# Altium PCB Dynamics Module v2.0.0.PcbDoc
Units mm, origin at the board's own origin, x right, y up, seen from the top; angles counter-clockwise.
Board outline 45.85 x 70 mm, 2 copper layers (Top Layer, Bottom Layer); 62 components, 40 nets, 242 pads, 118 vias.
Unrouted connection lines stored in the file: 57.
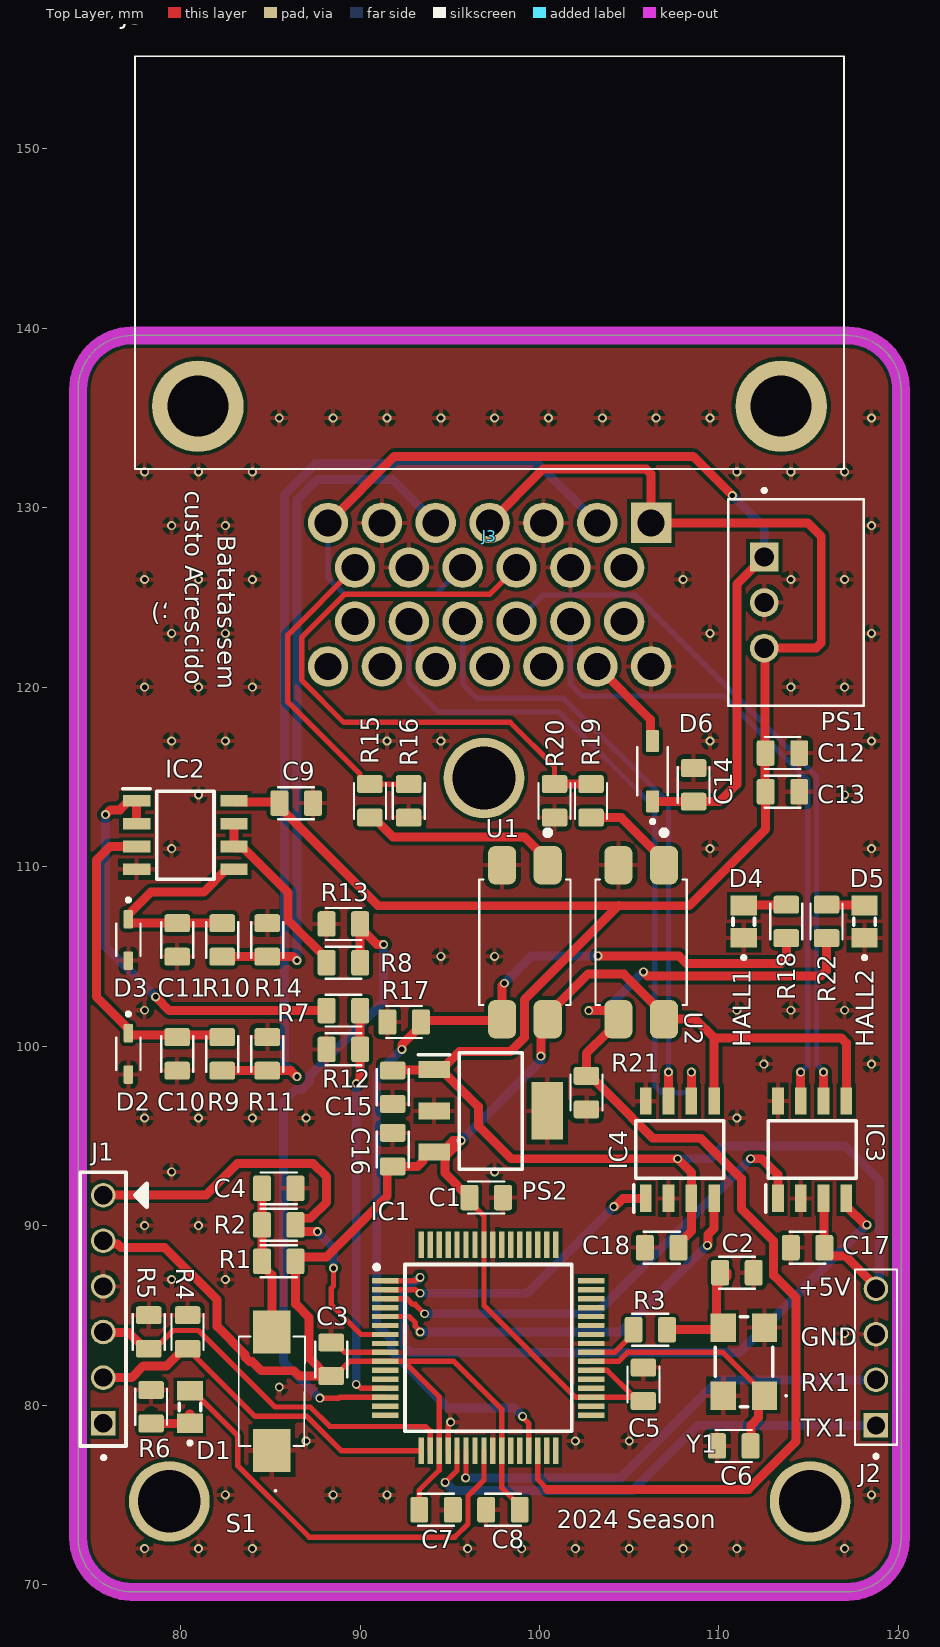
[diagram p0: Top Layer view]
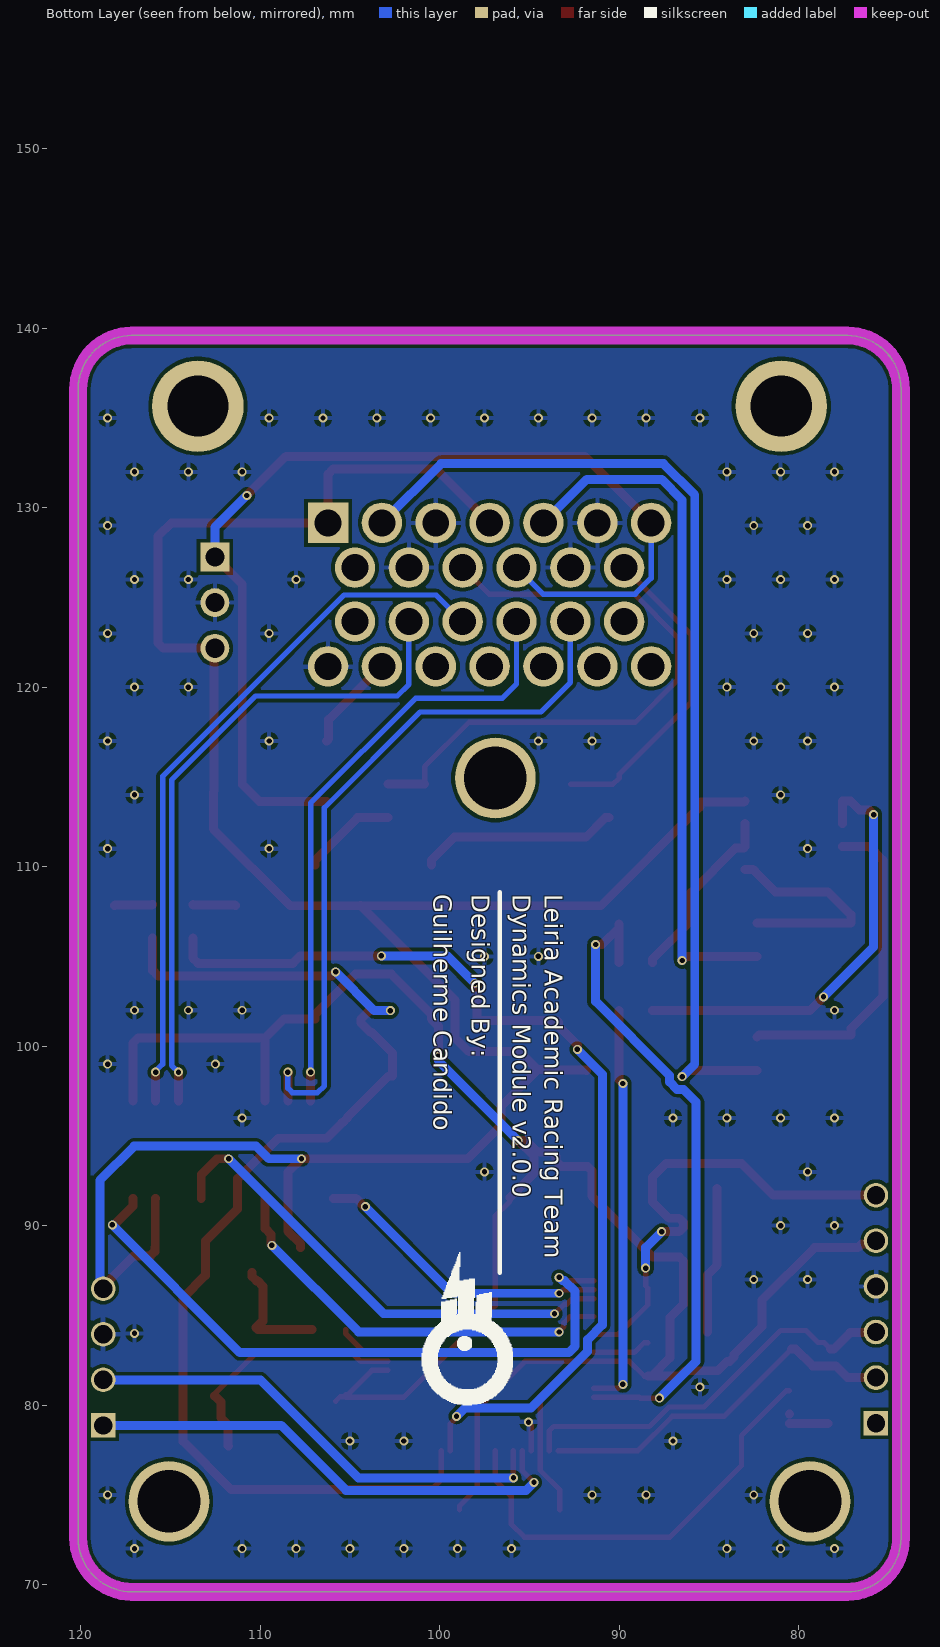
[diagram p1: Bottom Layer view, seen from below]
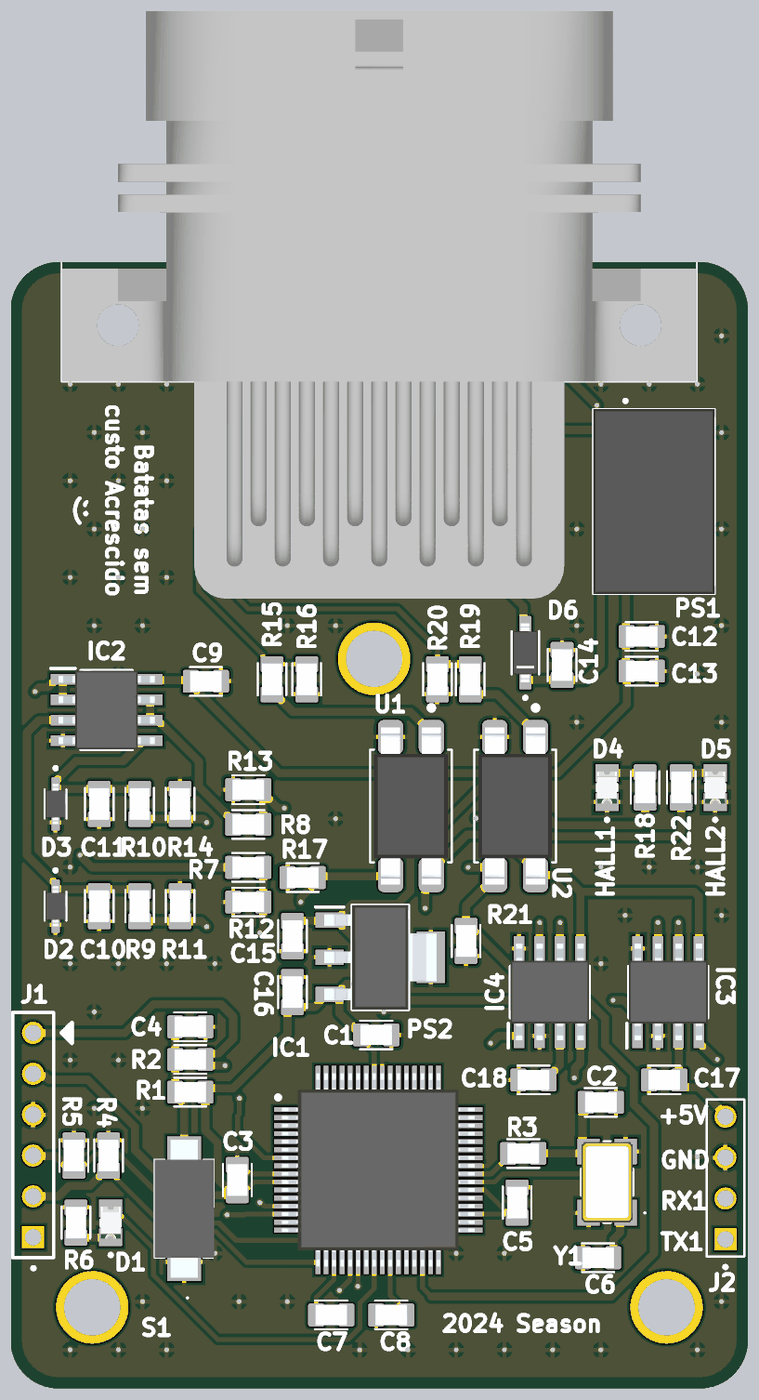
[diagram p2: 3D render of the assembled board from above, using the file's embedded part models]

## Layer stack, top to bottom
Top Solder: solder mask 0.0102, Solder Resist, Dk 3.5
Top Layer: signal copper 0.0356
Dielectric 1: dielectric 0.32, FR-4, Dk 4.8
Bottom Layer: signal copper 0.0356
Bottom Solder: solder mask 0.0102, Solder Resist, Dk 3.5

## Board outline
74.295,72.596 74.295,136.596 cw(c77.295,136.596) 77.295,139.596 117.142,139.596 cw(c117.142,136.596) 120.142,136.596 120.142,72.596 cw(c117.142,72.596) 117.142,69.596 77.295,69.596 cw(c77.295,72.596)

## Design rules (kind name [scope] priority, off if disabled: settings)
Clearance [All] p1: gap=0.2 ignorepadtopadclearanceinfootprint=TRUE
HoleSize [All] p1: absolutevalues=TRUE maxlimit=6.3 minlimit=0.3 maxpercent=80.000 minpercent=20.000
HoleToHoleClearance [All] p1: gap=0.5 allowstackedmicrovias=TRUE
PolygonConnect [All] p1: connectstyle=Relief reliefconductorwidth=0.254 reliefentries=4 polygonreliefangle="90 Angle" airgapwidth=0.254
RoutingVias [All] p1: holewidth=0.711 width=1.27 viastyle="Through Hole" minholewidth=0.3 minwidth=0.5 maxholewidth=6.3 maxwidth=10
SilkToSilkClearance [All] p1: silktosilkclearance=0
SolderMaskExpansion [All] p1: expansion=0.102 istentingtop=FALSE
UnRoutedNet [All] p1: checkbadconnections=TRUE
Width [All] p1: maxlimit=5 minlimit=0.127 preferedwidth=0.5 minimp=50.000000 maximp=50.000000 favimp=50.000000
26 further rules are at their usual default settings.

## Classes and differential pairs
component class "Power Circuitry": C12 C13 C14 C15 C16 D6 PS1 PS2
component class PIC32MK1024MCM064: C1 C2 C3 C4 C5 C6 C7 C8 D1 IC1 J1 R1 R2 R3 R4 R5 R6 S1 Y1
component class "Digital Circuitry": D4 D5 R15 R16 R17 R18 R19 R20 R21 R22 U1 U2
component class Connector: J3
component class "COMM Circuitry": C17 C18 IC3 IC4 J2
component class "Analog Circuitry": C9 C10 C11 D2 D3 IC2 R7 R8 R9 R10 R11 R12 R13 R14

## Components (designator, comment, footprint, x,y, rotation, side; value= is the part's Value field where it differs from the comment)
C1 "0.1uF" 0805 97.028,91.567 r180 top
C2 "22pF" 0805 110.998,87.376 r0 top
C3 "0.1uF" 0805 88.392,82.55 r90 top
C4 "0.1uF" 0805 85.471,92.075 r180 top
C5 "0.1uF" 0805 105.791,81.153 r270 top
C6 "22pF" 0805 110.825,77.724 r0 top
C7 "0.1uF" 0805 94.234,74.168 r180 top
C8 "0.1uF" 0805 97.963,74.168 r0 top
C9 "0.1uF" 0805 86.441,113.538 r180 top
C10 "10nF" 0805 79.812,99.568 r90 top
C11 "10nF" 0805 79.812,105.918 r90 top
C12 "10uF" 0805 113.538,116.332 r180 top
C13 "1uF" 0805 113.538,114.173 r180 top
C14 "10uF" 0805 108.585,114.554 r270 top
C15 "0.1uF" 0805 91.821,97.709 r90 top
C16 "0.1uF" 0805 91.821,94.234 r270 top
C17 "0.1uF" 0805 114.935,88.773 r0 top
C18 "0.1uF" 0805 106.807,88.773 r0 top
D1 "GREEN" "LED 0805" 80.518,79.894 r90 top
D2 "5.1V" SOD323 77.091,99.568 r270 top
D3 "5.1V" SOD323 77.091,105.918 r270 top
D4 "BLUE" "LED 0805" 111.379,106.934 r90 top
D5 "BLUE" "LED 0805" 118.11,106.934 r90 top
D6 "1N4007" SOD123 106.299,115.316 r90 top
IC1 "PIC32MK1024MCM064-I_PT" PIC32MK1024MCM064-I_PT 97.155,83.185 r0 top
IC2 "MCP6052-E_SN" MCP6052-E_SN 80.264,111.76 r0 top
IC3 "MCP2542FDT-E_SN" MCP2542FDT-E_SN 115.189,94.234 r90 top
IC4 "MCP2542FDT-E_SN" MCP2542FDT-E_SN 107.823,94.234 r90 top
J1 "6-POS 2.54mm Straight Header" "6-POS 2.54mm Header" 75.692,85.344 r270 top
J2 "4-POS 2.54mm Header" "4-POS 2.54mm Header" 118.745,78.867 r90 top
J3 "6473423-1" 64734231 106.218,129.159 r180 top locked
PS1 "R-78K5.0-0.5" CONV_R-78K5.0-0.5 114.297,124.714 r270 top
PS2 "MCP1755S-3302E_DB" MCP1755S-3302E_DB 97.282,96.393 r0 top
R1 "10k" 0805 85.471,88.011 r0 top
R2 "1k" 0805 85.471,90.043 r180 top
R3 "0805_Resistor" 0805 106.172,84.201 r0 top
R4 "10k" 0805 80.391,84.074 r270 top
R5 "10k" 0805 78.232,84.074 r270 top
R6 "10k" 0805 78.359,79.909 r270 top
R7 "10k" 0805 89.073,101.981 r180 top
R8 "10k" 0805 89.073,104.648 r180 top
R9 "1k" 0805 82.324,99.568 r90 top
R10 "1k" 0805 82.324,105.918 r90 top
R11 "1M" 0805 84.835,99.568 r270 top
R12 "20k" 0805 89.073,99.822 r0 top
R13 "20k" 0805 89.073,106.807 r0 top
R14 "1M" 0805 84.835,105.918 r270 top
R15 "1.3k" 0805 90.551,113.665 r270 top
R16 "10k" 0805 92.71,113.665 r90 top
R17 "10k" 0805 92.456,101.346 r0 top
R18 "1.2k" 0805 113.75,106.949 r270 top
R19 "1.3k" 0805 102.87,113.665 r270 top
R20 "10k" 0805 100.838,113.665 r90 top
R21 "10k" 0805 102.616,97.409 r90 top
R22 "1.2k" 0805 115.993,106.949 r270 top
S1 "SPST Button" "SPST Button" 85.09,80.77 r90 top
U1 "PC817" PC817 99.187,105.791 r270 top
U2 "PC817" PC817 105.664,105.791 r270 top
Y1 "8MHz" "Crystal 5x3.2 - 4Pads" 111.386,82.418 r90 top
? "M3 Mounting Hole" "M3 - Mounting Hole"#1 80.772,74.295 r0 top
? "M3 Mounting Hole" "M3 - Mounting Hole"#2 114.681,74.041 r0 top
? "M3 Mounting Hole" "M3 - Mounting Hole"#3 97.218,114.935 r0 top locked

## Footprints (in the part's own frame and the unit in brackets; to place one, negate y for a bottom-side part, rotate by r counter-clockwise, add the part's x,y. Pads: shape width x height; smd on the part's side, far side on the other; paste and mask are expansions set on the pad)
"4-POS 2.54mm Header" [mm]
  rect 1.37x1.37 hole 1.02: 1(0,0)
  round 1.37 hole 1.02: 2(2.54,0) 3(5.08,0) 4(7.62,0)
  silkscreen extent -1.82,-1.17 8.69,1.17
"6-POS 2.54mm Header" [mm]
  rect 1.37x1.37 / inner round 1.37 / far side rect 1.37x1.37 hole 1.02: 01(6.35,0)
  round 1.37 hole 1.02: 02(3.81,0) 03(1.27,0) 04(-1.27,0) 05(-3.81,0) 06(-6.35,0)
  silkscreen extent -7.62,-1.27 8.37,1.27
0805 [mm]
  rrect25% 1x1.42 smd: 1(-0.935,0) 2(0.935,0)
  silkscreen extent -1,-0.89 1,0.89, body extent -1,-0.63 1,0.63, height 0.6
64734231 [mm]
  rect 2.25x2.25 hole 1.5: 1(0,0)
  round 2.25 hole 1.5: 2(3,0) 3(6,0) 4(9,0) 5(12,0) 6(15,0) 7(18,0) 8(16.5,2.5) 9(13.5,2.5) 10(10.5,2.5) 11(7.5,2.5) 12(4.5,2.5) 13(1.5,2.5) 14(1.5,5.5) 15(4.5,5.5) 16(7.5,5.5) 17(10.5,5.5) 18(13.5,5.5) 19(16.5,5.5) 20(18,8) 21(15,8) 22(12,8) 23(9,8) 24(6,8) 25(3,8) 26(0,8)
  round 5.1 hole 3.4: MH1(-7.25,-6.5) MH2(25.25,-6.5)
  silkscreen extent -10.75,-26 28.75,-3, body extent -10.75,-26.01 28.75,10.49, height 28.27
CONV_R-78K5.0-0.5 [mm]
  rect 1.605x1.605 / inner round 1.605 / far side rect 1.605x1.605 hole 1.07: 1(-2.54,-1.775)
  round 1.605 hole 1.07: 2(0,-1.775) 3(2.54,-1.775)
  silkscreen extent -6.35,-3.77 5.75,3.77, body extent -5.75,-3.77 5.75,3.77, height 10.2
"Crystal 5x3.2 - 4Pads" [mm]
  rect 1.6x1.4 smd: 1(-1.9,-1.15) 2(1.9,-1.15) 3(1.9,1.15) 4(-1.9,1.15)
  silkscreen extent -2.5,-2.4 2.5,1.6, body extent -2.5,-1.6 2.5,1.6, height 0.95
"LED 0805" [mm]
  rect 1.1x1.45 smd: A(0.9,0) C(-0.9,0)
  silkscreen extent -2.1,-0.6 0.2,0.6, body extent -1,-0.63 1,0.63, height 0.7
"M3 - Mounting Hole"#1 [mm]
  round 4.5 / inner round 1.524 / far side round 4.5 hole 3.5: 1(-1.4,0.346)
"M3 - Mounting Hole"#2 [mm]
  round 4.5 / inner round 1.524 / far side round 4.5 hole 3.5: 1(0.4,0.6)
"M3 - Mounting Hole"#3 [mm]
  round 4.5 / inner round 1.524 / far side round 4.5 hole 3.5: 1(-0.318,0)
MCP1755S-3302E_DB [mm]
  rect 1.75x0.95 smd: 1(-3.15,2.3) 2(-3.15,0) 3(-3.15,-2.3)
  rect 1.75x3.2 smd: 4(3.15,0)
  silkscreen extent -4.03,-3.25 1.75,3.25, body extent -3.5,-3.25 3.5,3.25, height 1.8
MCP2542FDT-E_SN [mm]
  rect 1.525x0.65 smd: 1(-2.712,1.905) 2(-2.712,0.635) 3(-2.712,-0.635) 4(-2.712,-1.905) 5(2.712,-1.905) 6(2.712,-0.635) 7(2.712,0.635) 8(2.712,1.905)
  silkscreen extent -3.47,-2.45 1.6,2.58, body extent -3,-2.45 3,2.45, height 1.75
MCP6052-E_SN [mm]
  rect 1.525x0.65 smd: 1(-2.712,1.905) 2(-2.712,0.635) 3(-2.712,-0.635) 4(-2.712,-1.905) 5(2.712,-1.905) 6(2.712,-0.635) 7(2.712,0.635) 8(2.712,1.905)
  silkscreen extent -3.47,-2.45 1.6,2.58, body extent -3,-2.45 3,2.45, height 1.75
PC817 [mm]
  rrect50% 2.13x1.57 smd: 1(-4.29,1.27) 2(-4.29,-1.27) 3(4.29,-1.27) 4(4.29,1.27)
  silkscreen extent -6.25,-2.54 3.5,2.54, body extent -4.87,-2.29 4.87,2.29, height 4
PIC32MK1024MCM064-I_PT [mm]
  rect 1.475x0.3 smd: 1(-5.738,3.75) 2(-5.738,3.25) 3(-5.738,2.75) 4(-5.738,2.25) 5(-5.738,1.75) 6(-5.738,1.25) 7(-5.738,0.75) 8(-5.738,0.25) 9(-5.738,-0.25) 10(-5.738,-0.75) 11(-5.738,-1.25) 12(-5.738,-1.75) 13(-5.738,-2.25) 14(-5.738,-2.75) 15(-5.738,-3.25) 16(-5.738,-3.75) 33(5.738,-3.75) 34(5.738,-3.25) 35(5.738,-2.75) 36(5.738,-2.25) 37(5.738,-1.75) 38(5.738,-1.25) 39(5.738,-0.75) 40(5.738,-0.25) 41(5.738,0.25) 42(5.738,0.75) 43(5.738,1.25) 44(5.738,1.75) 45(5.738,2.25) 46(5.738,2.75) 47(5.738,3.25) 48(5.738,3.75)
  rect 0.3x1.475 smd: 17(-3.75,-5.738) 18(-3.25,-5.738) 19(-2.75,-5.738) 20(-2.25,-5.738) 21(-1.75,-5.738) 22(-1.25,-5.738) 23(-0.75,-5.738) 24(-0.25,-5.738) 25(0.25,-5.738) 26(0.75,-5.738) 27(1.25,-5.738) 28(1.75,-5.738) 29(2.25,-5.738) 30(2.75,-5.738) 31(3.25,-5.738) 32(3.75,-5.738) 49(3.75,5.738) 50(3.25,5.738) 51(2.75,5.738) 52(2.25,5.738) 53(1.75,5.738) 54(1.25,5.738) 55(0.75,5.738) 56(0.25,5.738) 57(-0.25,5.738) 58(-0.75,5.738) 59(-1.25,5.738) 60(-1.75,5.738) 61(-2.25,5.738) 62(-2.75,5.738) 63(-3.25,5.738) 64(-3.75,5.738)
  silkscreen extent -6.35,-4.65 4.65,4.65, body extent -6,-6 6,6, height 1.2
SOD123 [mm]
  rrect18% 1.21x0.73 smd: 1(1.68,0) 2(-1.68,0)
  silkscreen extent -2.9,-0.85 1.35,0.85, body extent -1.83,-0.77 1.83,0.77, height 1.45
SOD323 [mm]
  rrect25% 1.03x0.52 smd: 1(-1.15,0) 2(1.15,0)
  silkscreen extent -2.32,-0.68 0.9,0.68, body extent -1.24,-0.62 1.24,0.62, height 1.09
"SPST Button" [mm] "3mmx6mm"
  rect 2.4x2.1 smd: 1(-3.3,0) 2(3.3,0)
  silkscreen extent -5.6,-1.85 3.05,1.85, body extent -4.29,-1.85 4.29,1.85, height 2.8

## Part data
C1 C2 C3 C4 C5 C6 C7 C8 C9 C10 C11 C12 C13 C14 C15 C16 C17 C18: library part 0805_Capacitor, Package="0805 AVX", Availability="In Stock", Check_prices=https://www.snapeda.com/parts/LD051A121KAB2A/AVX/view-part/?ref=eda, MF=AVX, MP=LD051A121KAB2A, Price=None, Purchase-URL=https://pricing.snapeda.com/search/part/LD051A121KAB2A/?ref=eda, SnapEDA_Link=https://www.snapeda.com/parts/LD051A121KAB2A/AVX/view-part/?ref=snap
D1 D4 D5: library part "LED 0805", "LED Uni-Color Green 4-Pin Chip 0805 T/R", Package=None, Availability=Unavailable, MP=597-3305-607F, Price=None
D2 D3: library part "SOD323 - Zener Diode", Package="SMA-2 Taiwan Semiconductor", Availability="In Stock", Check_prices=https://www.snapeda.com/parts/1SMA5926/Taiwan+Semiconductor/view-part/?ref=eda, MF="Taiwan Semiconductor", MP=1SMA5926, Price=None, Purchase-URL=https://pricing.snapeda.com/search/part/1SMA5926/?ref=eda, SnapEDA_Link=https://www.snapeda.com/parts/1SMA5926/Taiwan+Semiconductor/view-part/?ref=snap
D6: library part "SOD123 - Rectifier Diode", Package="SOD-123 Fairchild Semiconductor", Availability="In Stock", Check_prices=https://www.snapeda.com/parts/1N4148W-7-F/Diodes+Inc./view-part/?ref=eda, MF="Diodes Inc.", MP=1N4148W-7-F, Price=None, Purchase-URL=https://pricing.snapeda.com/search/part/1N4148W-7-F/?ref=eda, SnapEDA_Link=https://www.snapeda.com/parts/1N4148W-7-F/Diodes+Inc./view-part/?ref=snap
IC1: "Integrated Circuit", Arrow Part Number=PIC32MK1024MCM064-I/PT, Manufacturer_Name=Microchip, Mouser Part Number=579-2MK1024MCM064IPT, Arrow Price/Stock=https://www.arrow.com/en/products/pic32mk1024mcm064-ipt/microchip-technology?region=nac, Datasheet Link=https://ww1.microchip.com/downloads/aemDocuments/documents/MCU32/ProductDocuments/DataSheets/PIC32MK-GPK-MCM-with-CAN-FD-Family-DataSheet-DS60001519E.pdf, Height=1.2mm, Manufacturer_Part_Number=PIC32MK1024MCM064-I/PT, Mouser Price/Stock=https://www.mouser.co.uk/ProductDetail/Microchip-Technology/PIC32MK1024MCM064-I-PT?qs=W%2FMpXkg%252BdQ4dBI32NJdQMg%3D%3D
IC2: "Integrated Circuit", Manufacturer_Name=Microchip, Manufacturer_Part_Number=MCP6052-E/SN, Mouser Part Number=579-MCP6052-E/SN, Datasheet Link=http://ww1.microchip.com/downloads/en/DeviceDoc/MCP6051_DS22182B.pdf, Height=1.75mm, Mouser Price/Stock=https://www.mouser.com/Search/Refine.aspx?Keyword=579-MCP6052-E%2FSN
IC3 IC4: "Integrated Circuit", Arrow Part Number=MCP2542FDT-E/SN, Manufacturer_Name=Microchip, Mouser Part Number=579-MCP2542FDT-E/SN, Arrow Price/Stock=https://www.arrow.com/en/products/mcp2542fdt-esn/microchip-technology?region=nac, Datasheet Link=https://ww1.microchip.com/downloads/en/DeviceDoc/MCP2542FD-MCP2542WFD-4WFD-Data-Sheet-DS20005514C.pdf, Height=1.75mm, Manufacturer_Part_Number=MCP2542FDT-E/SN, Mouser Price/Stock=https://www.mouser.co.uk/ProductDetail/Microchip-Technology/MCP2542FDT-E-SN?qs=qdgZG5p0FZ7dgTYBMrlrQQ%3D%3D
J1: "HEADER, 6 CONTACTS, 1 ROW, THROUGH HOLE, 2.54 MM; Connector Systems:Board-to-Board; Pitch Spacing:2.54mm; No. of Rows:1Rows; No. of Contacts:6Contacts; Contact Termination Type:Through Hole Right Angle; Product Range:HTSW Series RoHS Compliant: Yes", Package=None, Availability="In Stock", Check_prices=https://www.snapeda.com/parts/HTSW10608SSLA/Samtec/view-part/?ref=eda, MF=Samtec, MP=HTSW10608SSLA, Price=None, Purchase-URL=https://pricing.snapeda.com/search/part/HTSW10608SSLA/?ref=eda, SnapEDA_Link=https://www.snapeda.com/parts/HTSW10608SSLA/Samtec/view-part/?ref=snap
J2: Package=None, Availability=Unavailable, MP=5-146290-4, Price=None
J3: "Connector", Manufacturer_Name="TE Connectivity", Mouser Part Number=571-6473423-1, Datasheet Link=https://www.te.com/commerce/DocumentDelivery/DDEController?Action=showdoc&DocId=Customer+Drawing%7F9-1437287-8%7FA1%7Fpdf%7FEnglish%7FENG_CD_9-1437287-8_A1.pdf%7F6473423-1, Height=27.9mm, Manufacturer_Part_Number=6473423-1, Mouser Price/Stock=https://www.mouser.co.uk/ProductDetail/TE-Connectivity/6473423-1?qs=XhI5AayaxxW9FyxB9N39mQ%3D%3D
PS1: "0.5A DC/DC-Converter 'INNOLINE' SIP3 reg", Package=None, Availability="In Stock", Check_prices=https://www.snapeda.com/parts/R-78K5.0-0.5/Recom+Power/view-part/?ref=eda, MF="Recom Power", MP=R-78K5.0-0.5, Price=None, Purchase-URL=https://pricing.snapeda.com/search/part/R-78K5.0-0.5/?ref=eda, SnapEDA_Link=https://www.snapeda.com/parts/R-78K5.0-0.5/Recom+Power/view-part/?ref=snap
PS2: "Power Supply", Arrow Part Number=MCP1755S-3302E/DB, Manufacturer_Name=Microchip, Mouser Part Number=579-MCP1755S-3302EDB, Arrow Price/Stock=https://www.arrow.com/en/products/mcp1755s-3302edb/microchip-technology?region=nac, Datasheet Link=http://www.farnell.com/datasheets/1697992.pdf, Height=1.8mm, Manufacturer_Part_Number=MCP1755S-3302E/DB, Mouser Price/Stock=https://www.mouser.co.uk/ProductDetail/Microchip-Technology/MCP1755S-3302E-DB?qs=OCR3PNzn1cc7Hxpx9CIZgA%3D%3D
R1 R2 R4 R5 R6 R7 R8 R9 R10 R11 R12 R13 R14 R15 R16 R17 R18 R19 R20 R21 R22: library part 0805_Resistor, Package=0805, Power_Rating=".25 W", Resistance=.33, Tolerance=1%, Availability="In Stock", Check_prices=https://www.snapeda.com/parts/2-2176053-0/TE+Connectivity/view-part/?ref=eda, EU_RoHS_Compliance="Compliant with Exemptions", MF="TE Connectivity", MP=2-2176053-0, Price=None, SnapEDA_Link=https://www.snapeda.com/parts/2-2176053-0/TE+Connectivity/view-part/?ref=snap
R3: Package=0805, Power_Rating=".25 W", Resistance=.33, Tolerance=1%, Availability="In Stock", Check_prices=https://www.snapeda.com/parts/2-2176053-0/TE+Connectivity/view-part/?ref=eda, EU_RoHS_Compliance="Compliant with Exemptions", MF="TE Connectivity", MP=2-2176053-0, Price=None, SnapEDA_Link=https://www.snapeda.com/parts/2-2176053-0/TE+Connectivity/view-part/?ref=snap
S1: "3mmX6mm", Package=None, Availability=Unavailable, MP=B3U-1000P, Price=None
U1 U2: "Optoisolator Transistor Output 5000Vrms 1 Channel 4-SMD", Package="SMD-4 Sharp Microelectronics", Availability="In Stock", Check_prices=https://www.snapeda.com/parts/PC817XI/Sharp+Microelectronics/view-part/?ref=eda, MF="Sharp Microelectronics", MP=PC817XI, Price=None, Purchase-URL=https://pricing.snapeda.com/search/part/PC817XI/?ref=eda, SnapEDA_Link=https://www.snapeda.com/parts/PC817XI/Sharp+Microelectronics/view-part/?ref=snap
Y1: library part "Crystal 5x3.2 - 4Pads", "Crystal or Oscillator", Manufacturer_Name="Wurth Elektronik", Manufacturer_Part_Number=830106162701, Mouser Part Number=710-830106162701, Datasheet Link=https://www.we-online.com/components/products/datasheet/830106162701.pdf, Height=1mm, Mouser Price/Stock=https://www.mouser.co.uk/ProductDetail/Wurth-Elektronik/830106162701?qs=hd1VzrDQEGiB2nVeND4SIw%3D%3D

## Via types
v1: diameter 0.5, hole 0.3, Top Layer to Bottom Layer, tented both sides, 118 vias

## Nets (pads, with @x,y where several pads share a name; then routed paths per layer and width w, separated by ;. In a path a pad name is that pad's centre, name@x,y a point inside that pad or via, vN(x,y) a via of type N, cw(c..) or ccw(c..) an arc to the next point about the centre after c; other vN are vias at no path point)
+3V3: C1.2 C3.1 C5.2 C7.2 C8.2 C16.2 IC1.10 IC1.19 IC1.26 IC1.35 IC1.38 IC1.57 IC3.5 IC4.5 J1.05 PS2.3 R1.2 U1.4 U2.4 | length 123
  Top Layer w0.3: C3.1 88.602,81.615 89.422,82.435 IC1.10 92.444,82.435 ; C7.2 93.299,75.265 94.405,76.371 94.405,80.474 92.444,82.435 ; C1.2 96.093,91.357 96.905,90.545 IC1.57 96.905,85.541 102.011,80.435 IC1.35 C5.2@105.207,80.435 ; C8.2 98.898,74.378 97.905,75.371 IC1.26 97.905,79.768 95.238,82.435 92.444,82.435 ; IC1.38 103.775,81.935 105.142,80.568 105.231,80.568 105.241,80.558 105.241,80.469 105.54,80.469 C5.2
  Top Layer w0.5: J1.05 75.858,88.988 76.485,88.988 76.691,88.781 79.113,88.781 82.035,85.859 82.035,84.381 83.59,82.825 83.59,82.684 83.854,82.42 83.995,82.42 84.5,81.915 86.313,81.915 86.613,81.615 C3.1@88.182,81.615 ; C3.1 C3.1@88.182,81.615 ; C1.2 94.742,92.918 94.742,93.853 v1(95.631,94.742) 95.181,94.742 94.532,94.093 PS2.3 93.732,94.093 93.507,93.868 93.507,93.592 93.214,93.299 91.767,93.299 91.517,93.049 91.517,91.644 88.125,88.252 86.647,88.252 R1.2 86.406,85.64 87.169,84.877 87.169,82.628 C3.1@88.182,81.615 ; v1(100.076,99.441) 100.076,101.12 U1.4 100.457,101.781 102.689,104.013 104.702,104.013 106.934,101.781 U2.4 108.684,101.501 109.728,100.457 ; IC4.5 109.728,100.457 ; IC3.5 117.094,100.164 116.801,100.457 109.728,100.457
  Bottom Layer w0.5: v1(95.631,94.742) 100.076,99.187 v1(100.076,99.441)
+5: C9.2 C12.2 C13.2 C15.2 C17.2 C18.2 IC2.8 IC3.3 IC4.3 J2.4 J3.1 J3.4 PS1.3 PS2.1 | length 140.4
  Top Layer w0.5: IC2.8 83.04,113.602 85.443,113.602 C9.2 85.506,113.328 91.011,107.823 104.394,107.823 108.331,107.823 112.603,112.095 C13.2 112.563,114.214 112.563,122.133 PS1.3 115.404,122.174 115.697,122.467 115.697,128.397 114.935,129.159 J3.1 106.218,131.868 105.925,132.161 100.22,132.161 J3.4 ; C15.2 91.846,98.668 94.108,98.668 PS2.1 PS2.1@94.532,98.693 ; 104.417,107.846 99.152,102.581 99.152,100.48 98.371,99.699 95.538,99.699 PS2.1@94.532,98.693 ; C18.2 107.742,88.983 108.458,89.699 IC4.3 108.458,92.964 v1(107.696,93.726) 98.425,93.726 96.591,95.56 96.591,96.634 PS2.1@94.532,98.693 ; IC3.3 115.847,91.499 115.847,88.796 C17.2 115.87,88.563 116.12,88.313 117.046,88.313 J2.4@118.872,86.487
  Bottom Layer w0.5: v1(107.696,93.726) 109.523,93.726 110.223,94.426 117.029,94.426 118.937,92.518 118.937,86.552 J2.4@118.872,86.487
+24: C14.2 D6.2 J3.7 J3.10 PS1.1 | length 59.1
  Top Layer w0.5: J3.7 91.92,132.861 108.566,132.861 v1(110.744,130.683) ; D6.2 106.308,113.627 108.577,113.627 C14.2 110.028,113.619 110.999,114.59 110.999,125.731 PS1.1
  Bottom Layer w0.3: J3.7 88.218,126.073 89.107,125.184 94.243,125.184 J3.10
  Bottom Layer w0.5: v1(110.744,130.683) 112.522,128.905 PS1.1
+BAT: D6.1 J3.25 | length 5.4
  Top Layer w0.5: J3.25 106.184,118.193 106.184,117.111 D6.1
GND: C1.1 C2.2 C3.2 C4.1 C5.1 C6.1 C7.1 C8.1 C9.1 C10.1 C11.1 C12.1 C13.1 C14.1 C15.1 C16.1 C17.1 C18.1 D2.2 D3.2 D4.C D5.C IC1.9 IC1.20 IC1.25 IC1.41 IC1.56 IC2.4 IC3.2 IC3.8 IC4.2 IC4.8 J1.04 J2.3 J3.3 J3.6 J3.9 J3.12 J3.26 PS1.2 PS2.2 PS2.4 R4.1 R5.1 R6.1 R11.1 R12.1 R13.1 R14.1 R16.1 R17.1 R20.1 R21.1 S1.1 U1.2 U2.2 Y1.2 Y1.4 | length 4.9
  Top Layer w0.3: C3.2 88.602,83.485 89.152,82.935 IC1.9 ; IC1.20 94.905,78.849 95.053,78.996 v1(95.053,79.051)
  other v1: 78,72 81,72 84,72 96,72 99,72 102,72 105,72 108,72 111,72 117,72 82.5,75 88.5,75 91.5,75 118.5,75 87,78 102,78 105,78 85.5,81 117,84 79.5,87 82.5,87 78,90 81,90 79.5,93 97.5,93 78,96 81,96 84,96 87,96 111,96 112.5,99 118.5,99 78,102 111,102 114,102 117,102 94.5,105 97.5,105 79.5,111 109.5,111 118.5,111 81,114 117,114 79.5,117 82.5,117 91.5,117 94.5,117 109.5,117 118.5,117 78,120 81,120 84,120 114,120 117,120 79.5,123 82.5,123 109.5,123 118.5,123 78,126 81,126 84,126 108,126 114,126 117,126 79.5,129 82.5,129 118.5,129 78,132 81,132 84,132 111,132 114,132 117,132 85.5,135 88.5,135 91.5,135 94.5,135 97.5,135 100.5,135 103.5,135 106.5,135 109.5,135 118.5,135
NetC2_1: C2.1 R3.2 Y1.3 | length 6.7
  Top Layer w0.5: R3.2 110.119,84.201 Y1.3 109.855,84.699 109.855,86.623 110.148,86.916 110.194,86.916 110.444,87.166 C2.1@110.444,87.376
NetC4_2: C4.2 R1.1 R2.2 S1.2 | length 8.2
  Top Layer w0.5: C4.2 R2.2 R1.1 84.536,87.801 85.09,87.247 S1.2
NetC6_2: C6.2 IC1.39 Y1.1 | length 14
  Top Layer w0.3: IC1.39 104.406,82.435 104.909,82.938 110.216,82.938 112.536,80.618 Y1.1
  Top Layer w0.5: C6.2 111.784,77.748 111.784,78.891 112.193,79.3 112.193,80.175 Y1.1
NetC10_2: C10.2 D2.1 IC2.3 R9.2 | length 18.3
  Top Layer w0.5: IC2.3 76.073,111.125 75.311,110.363 75.311,102.753 77.091,100.973 D2.1 77.091,100.62 77.101,100.61 82.217,100.61 R9.2
NetC11_2: C11.2 D3.1 IC2.5 R10.2 | length 12.6
  Top Layer w0.5: R10.2 C11.2 77.101,106.853 77.091,106.863 77.091,107.323 78.353,108.585 81.28,108.585 82.464,109.769 82.464,109.78 82.539,109.855 IC2.5
NetD1_A: D1.A IC1.24 | length 24.6
  Top Layer w0.3: D1.A 80.693,80.794 83.185,78.302 83.185,76.63 87.171,72.644 95.277,72.644 96.019,73.386 96.019,74.937 96.905,75.823 IC1.24
NetD1_C: D1.C R6.2 | length 2.2
  Top Layer w0.5: R6.2 78.369,78.984 D1.C@80.508,78.984 ; D1.C@80.508,79.492 D1.C@80.518,79.502
NetD4_A: D4.A R18.1 | length 2.4
  Top Layer w0.5: D4.A 111.404,107.859 113.725,107.859 R18.1
NetD5_A: D5.A R22.1 | length 2.1
  Top Layer w0.5: R22.1 116.018,107.859 118.085,107.859 D5.A
NetIC1_1: IC1.1 IC3.4 | length 37.2
  Top Layer w0.3: IC1.1 93.104,86.935 93.291,87.122 v1(93.345,87.122)
  Top Layer w0.5: IC3.4 117.094,91.084 118.135,90.043 v1(118.237,90.043)
  Bottom Layer w0.5: v1(93.345,87.122) 93.156,86.933 93.055,86.933 92.456,86.334 92.456,83.286 92.811,82.931 111.125,82.931 v1(118.237,90.043)
NetIC1_2: IC1.2 IC4.1 | length 16.8
  Top Layer w0.3: IC1.2 93.089,86.435 93.291,86.233 v1(93.345,86.233)
  Top Layer w0.5: v1(104.14,91.059) 104.194,91.059 104.657,91.522 IC4.1
  Bottom Layer w0.5: v1(93.345,86.233) 99.314,86.233 v1(104.14,91.059)
NetIC1_3: IC1.3 IC3.1 | length 27.5
  Top Layer w0.3: IC1.3 92.605,85.935 92.923,85.616 93.073,85.616 v1(93.599,85.09)
  Top Layer w0.5: v1(111.76,93.726) 112.395,93.726 113.284,92.837 IC3.1
  Bottom Layer w0.5: v1(93.599,85.09) 103.124,85.09 v1(111.76,93.726)
NetIC1_5: IC1.5 IC4.4 | length 23.2
  Top Layer w0.3: IC1.5 92.738,84.935 93.083,84.59 93.083,84.39 93.345,84.128 v1(93.345,84.074)
  Top Layer w0.5: v1(109.347,88.9) 109.385,88.938 109.385,89.5 109.728,89.843 IC4.4
  Bottom Layer w0.5: v1(93.345,84.074) 104.521,84.074 v1(109.347,88.9)
NetIC1_7: IC1.7 J1.06 R2.1 | length 26.9
  Top Layer w0.3: R2.1 R2.1@86.406,90.161 ; v1(88.519,87.63) 88.519,86.637 88.406,86.523 88.406,85.584 90.055,83.935 IC1.7
  Top Layer w0.5: J1.06 81.407,91.694 83.185,93.472 87.376,93.472 88.138,92.71 88.138,91.313 87.236,90.411 86.656,90.411 R2.1@86.406,90.161 ; R2.1 86.406,89.912 86.656,89.662 v1(87.63,89.662)
  Bottom Layer w0.5: v1(87.63,89.662) 88.519,88.773 v1(88.519,87.63)
NetIC1_13: IC1.13 R7.1 R12.2 | length 22.6
  Top Layer w0.3: v1(89.789,81.153) 89.843,81.153 90.061,80.935 IC1.13
  Top Layer w0.5: v1(89.789,97.917) 90.008,98.136 R12.2 R7.1
  Bottom Layer w0.5: v1(89.789,81.153) v1(89.789,97.917)
NetIC1_14: IC1.14 R8.1 R13.2 | length 36.2
  Top Layer w0.3: v1(87.757,80.391) 88.827,80.391 88.871,80.435 IC1.14
  Top Layer w0.5: R8.1 R13.2@90.008,106.597 ; R13.2 R13.2@90.008,106.597 ; v1(91.313,105.664) 90.941,105.664 R13.2@90.008,106.597
  Bottom Layer w0.5: v1(87.757,80.391) 85.725,82.423 85.725,96.901 86.422,97.598 86.777,97.598 87.187,98.008 87.187,98.363 91.313,102.489 v1(91.313,105.664)
NetIC1_21: IC1.21 J2.1 | length 27.8
  Top Layer w0.3: v1(94.742,75.692) 95.405,76.355 IC1.21
  Bottom Layer w0.5: v1(94.742,75.692) 95.188,75.246 105.206,75.246 108.827,78.867 J2.1@118.872,78.867
NetIC1_22: IC1.22 J2.2 | length 26.8
  Top Layer w0.3: v1(95.885,75.946) 95.905,75.966 IC1.22
  Bottom Layer w0.5: v1(95.885,75.946) 104.53,75.946 109.991,81.407 J2.2@118.872,81.407
NetIC1_29: IC1.29 R17.2 R18.2 U1.3 | length 55
  Top Layer w0.3: v1(99.06,79.375) 99.06,79.321 99.405,78.976 IC1.29
  Top Layer w0.5: v1(92.329,99.822) 92.329,100.074 93.391,101.136 R17.2 93.468,101.424 97.839,101.424 U1.3 97.917,103.378 v1(98.044,103.505) ; v1(103.251,105.029) 107.761,105.029 108.185,104.606 113.457,104.606 113.75,104.898 R18.2
  Bottom Layer w0.5: v1(92.329,99.822) 90.932,98.425 90.932,84.469 91.756,83.645 91.756,82.996 94.918,79.834 98.601,79.834 v1(99.06,79.375) ; v1(98.044,103.505) 99.568,105.029 v1(103.251,105.029)
NetIC1_30: IC1.30 R21.2 R22.2 U2.3 | length 66.2
  Top Layer w0.3: IC1.30 99.905,75.863 100.457,75.311
  Top Layer w0.5: 100.457,75.311 111.633,75.311 114.3,77.978 114.3,85.979 113.05,87.229 113.05,89.134 111.252,90.932 111.252,92.613 108.996,94.869 106.301,94.869 105.436,95.734 105.407,95.734 105.143,95.997 105.143,96.027 102.826,98.344 R21.2 102.616,99.594 103.796,100.774 103.87,100.774 104.394,101.298 U2.3 103.914,101.981 v1(102.743,101.981) ; v1(105.791,104.14) 106.025,103.906 115.678,103.906 115.993,104.221 R22.2
  Bottom Layer w0.5: v1(102.743,101.981) 103.632,101.981 v1(105.791,104.14)
NetIC1_40: IC1.40 R3.1 | length 3
  Top Layer w0.3: IC1.40 104.181,82.935 105.237,83.991 R3.1
NetIC2_1: IC2.1 IC2.2 R7.2 | length 24.5
  Top Layer w0.5: v1(75.819,112.903) 76.086,113.17 76.619,113.17 77.114,113.665 IC2.1 IC2.2 ; v1(78.613,102.743) 79.375,101.981 R7.2
  Bottom Layer w0.5: v1(75.819,112.903) 75.819,105.537 v1(78.613,102.743)
NetIC2_6: IC2.6 IC2.7 R8.2 | length 10.2
  Top Layer w0.5: IC2.7 IC2.6 83.051,111.05 83.505,111.05 85.995,108.56 85.995,107.001 88.138,104.858 R8.2
NetIC3_6: IC3.6 J3.16 | length 39.8
  Top Layer w0.5: IC3.6 v1(115.824,98.552)
  Bottom Layer w0.3: J3.16 100.193,125.134 105.329,125.134 115.435,115.028 115.435,98.995 115.824,98.606 v1(115.824,98.552)
NetIC3_7: IC3.7 J3.15 | length 37
  Top Layer w0.5: IC3.7 v1(114.554,98.552)
  Bottom Layer w0.3: J3.15 101.718,120.151 102.362,119.507 110.249,119.507 114.935,114.821 114.935,98.933 v1(114.554,98.552)
NetIC4_6: IC4.6 J3.18 | length 40.3
  Top Layer w0.5: IC4.6 v1(108.458,98.552)
  Bottom Layer w0.3: J3.18 92.718,120.261 94.361,118.618 101.092,118.618 106.426,113.284 106.426,97.79 106.807,97.409 108.204,97.409 108.458,97.663 v1(108.458,98.552)
NetIC4_7: IC4.7 J3.17 | length 34.3
  Top Layer w0.5: IC4.7 v1(107.188,98.552)
  Bottom Layer w0.3: J3.17 95.718,120.182 96.52,119.38 101.346,119.38 107.188,113.538 v1(107.188,98.552)
NetJ3_2: J3.2 R9.1 R11.2 | length 56.5
  Top Layer w0.5: R9.1 R11.2 86.152,98.633 v1(86.487,98.298)
  Bottom Layer w0.5: v1(86.487,98.298) 85.787,98.998 85.787,130.719 87.529,132.461 99.916,132.461 J3.2
NetJ3_5: J3.5 R10.1 R14.2 | length 39.1
  Top Layer w0.5: R10.1 R14.2 86.279,104.983 v1(86.487,104.775)
  Bottom Layer w0.5: v1(86.487,104.775) 86.487,130.429 87.63,131.572 91.805,131.572 J3.5
NetJ3_8: J3.8 R15.1 R16.2 | length 17.8
  Top Layer w0.3: J3.8 85.979,122.92 85.979,119.172 89.991,115.16 89.991,114.95 90.341,114.6 R16.2
NetJ3_11: J3.11 R19.1 R20.2 | length 35.1
  Top Layer w0.3: J3.11 97.243,125.184 89.157,125.184 86.743,122.77 86.743,120.394 89.092,118.045 98.363,118.045 100.838,115.57 R20.2
  Top Layer w0.5: R20.2 R19.1
NetR15_2: R15.2 U1.1 | length 11.2
  Top Layer w0.5: R15.2 90.761,112.73 91.847,111.644 99.174,111.644 100.457,110.361 U1.1
NetR19_2: R19.2 U2.1 | length 5.3
  Top Layer w0.5: R19.2 104.565,112.73 106.934,110.361 U2.1
PGEC1: IC1.17 J1.02 R4.2 | length 20.7
  Top Layer w0.3: R4.2 84.155,79.375 87.04,79.375 88.968,77.447 IC1.17
  Top Layer w0.5: J1.02 77.276,81.534 77.924,82.182 79.224,82.182 80.181,83.139 R4.2
PGED1: IC1.18 J1.03 R5.2 | length 22.5
  Top Layer w0.3: R5.2 78.582,83.489 78.917,83.489 79.587,84.159 81.003,84.159 85.266,79.896 87.226,79.896 88.315,78.807 93.659,78.807 93.905,78.561 IC1.18
  Top Layer w0.5: J1.03 75.732,84.034 77.127,84.034 78.022,83.139 R5.2
pads on no net: ?.1 IC1.4 IC1.6 IC1.8 IC1.11 IC1.12 IC1.15 IC1.16 IC1.23 IC1.27 IC1.28 IC1.31 IC1.32 IC1.33 IC1.34 IC1.36 IC1.37 IC1.42 IC1.43 IC1.44 IC1.45 IC1.46 IC1.47 IC1.48 IC1.49 IC1.50 IC1.51 IC1.52 IC1.53 IC1.54 IC1.55 IC1.58 IC1.59 IC1.60 IC1.61 IC1.62 IC1.63 IC1.64 J1.01 J3.13 J3.14 J3.19 J3.20 J3.21 J3.22 J3.23 J3.24 J3.MH1 J3.MH2

## Polygon pours and split planes (outlines as drawn)
GND on Bottom Layer "GND_L02_P001" (solid, remove dead copper, pour order 1): 74.295,72.596 74.295,136.596 cw(c77.295,136.596) 77.295,139.596 117.142,139.596 cw(c117.142,136.596) 120.142,136.596 120.142,72.596 cw(c117.142,72.596) 117.142,69.596 77.295,69.596 cw(c77.295,72.596)
GND on Top Layer "GND_L01_P000" (solid, remove dead copper, pour order 0): 74.295,72.596 74.295,136.596 cw(c77.295,136.596) 77.295,139.596 117.142,139.596 cw(c117.142,136.596) 120.142,136.596 120.142,72.596 cw(c117.142,72.596) 117.142,69.596 77.295,69.596 cw(c77.295,72.596)

## Keep-outs
Keep-Out Layer:
  the board outline again, w1

## Silkscreen, mask and mechanical layers (free items; w line width, h text height)
Top Overlay:
  lines w0.254: 77.787,92.011 77.787,91.376 77.978,91.186 77.978,92.075 ; 77.47,91.694 78.105,91.059 78.105,92.329 77.47,91.694
  text "custo Acrescido" at 80.264,130.937 h1 r270
  text "Batatas sem" at 82.086,128.46 h1 r270
  text ";)" at 79.375,124.547 h1 r180
  text "HALL1" at 111.76,99.949 h1 r90
  text "HALL2" at 118.618,99.949 h1 r90
  text "+5V" at 114.427,86.106 h1
  text "GND" at 114.554,83.312 h1
  text "RX1" at 114.554,80.772 h1
  text "TX1" at 114.554,78.232 h1
  text "2024 Season" at 100.965,73.152 h1
Bottom Overlay:
  drawing of 3 lines, arcs and shapes, not listed
  text "Leiria Academic Racing Team" at 94.155,108.458 h1 r90
  text "Dynamics Module v2.0.0" at 95.933,108.458 h1 r90
  text "Designed By:" at 98.219,108.458 h1 r90
  text "Guilherme Candido" at 100.33,108.458 h1 r90